# Altium PCB classyTKL_SMK.PcbDoc (part 1 of 2)
Units mm, origin at the board's own origin, x right, y up, seen from the top; angles counter-clockwise.
Board outline 346.59 x 122.85 mm, 2 copper layers (Component Side, Bottom Layer), stack 1.571 mm thick; 201 components, 128 nets, 842 pads, 69 vias.
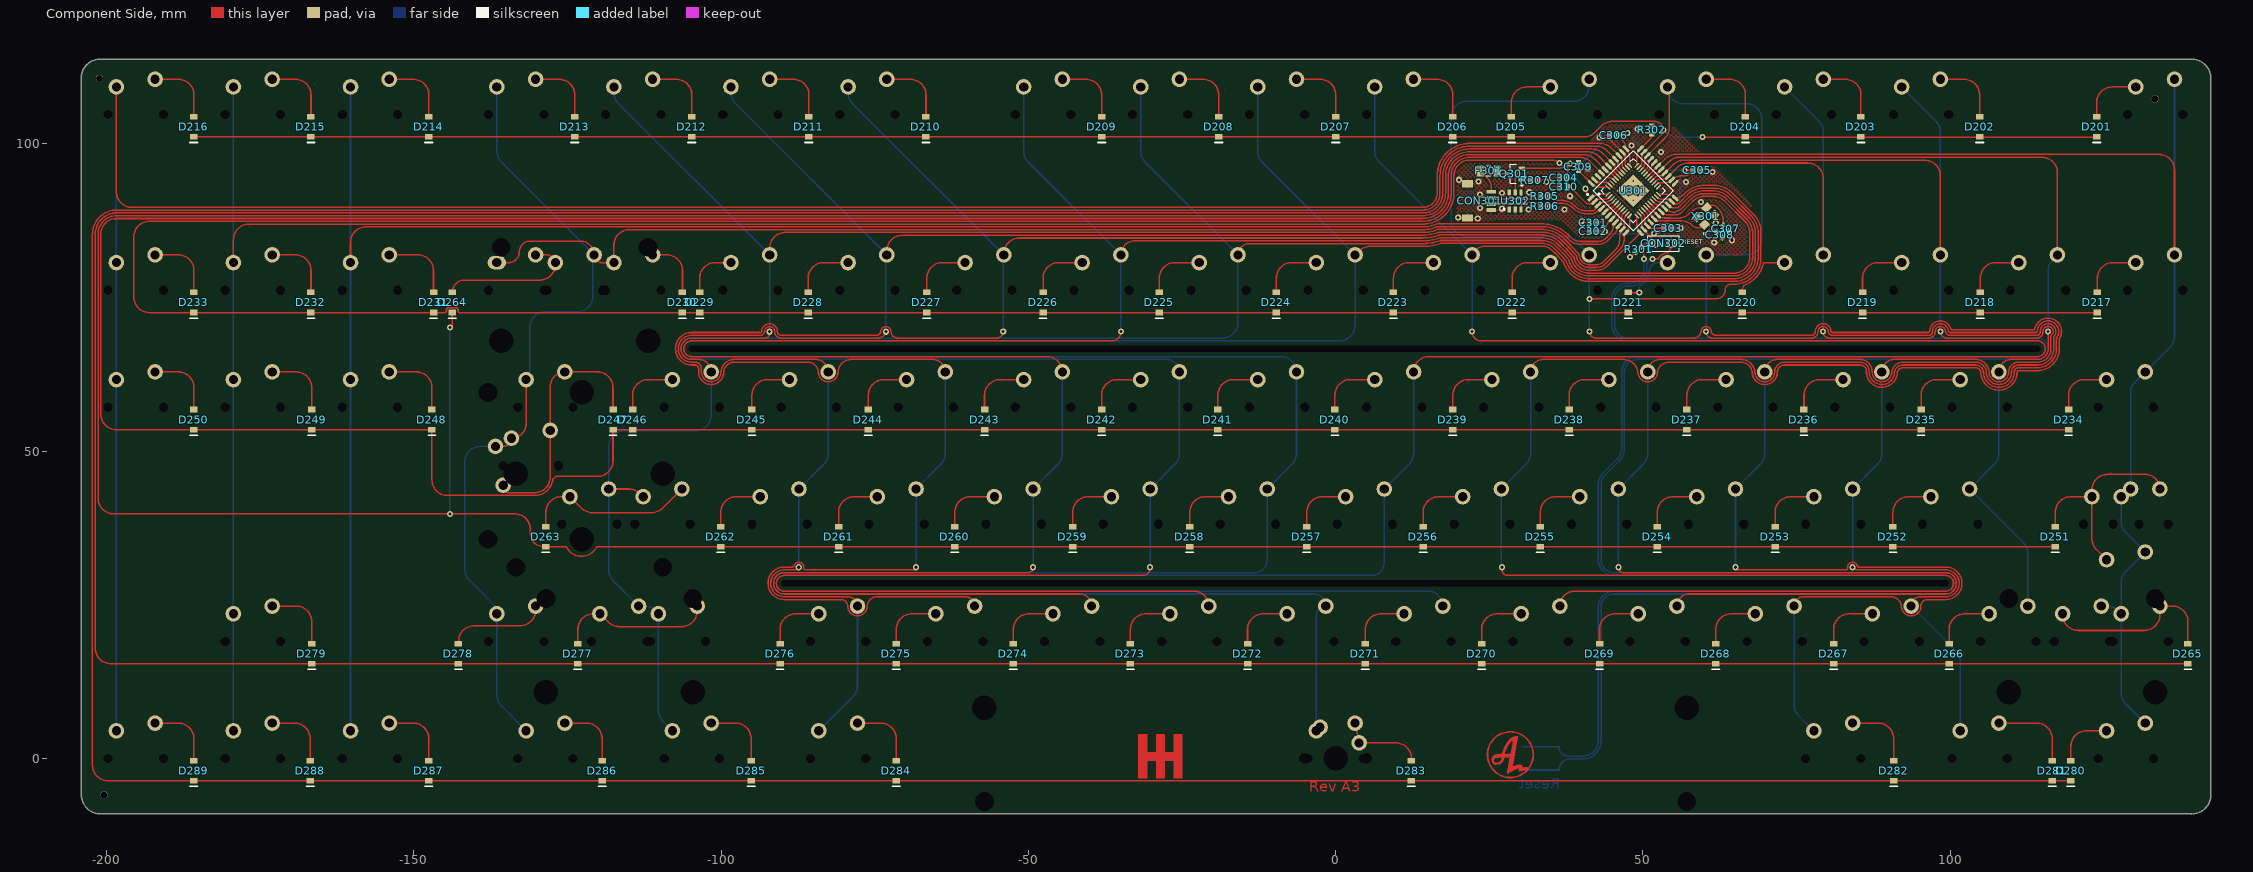
[diagram p0: Component Side view]
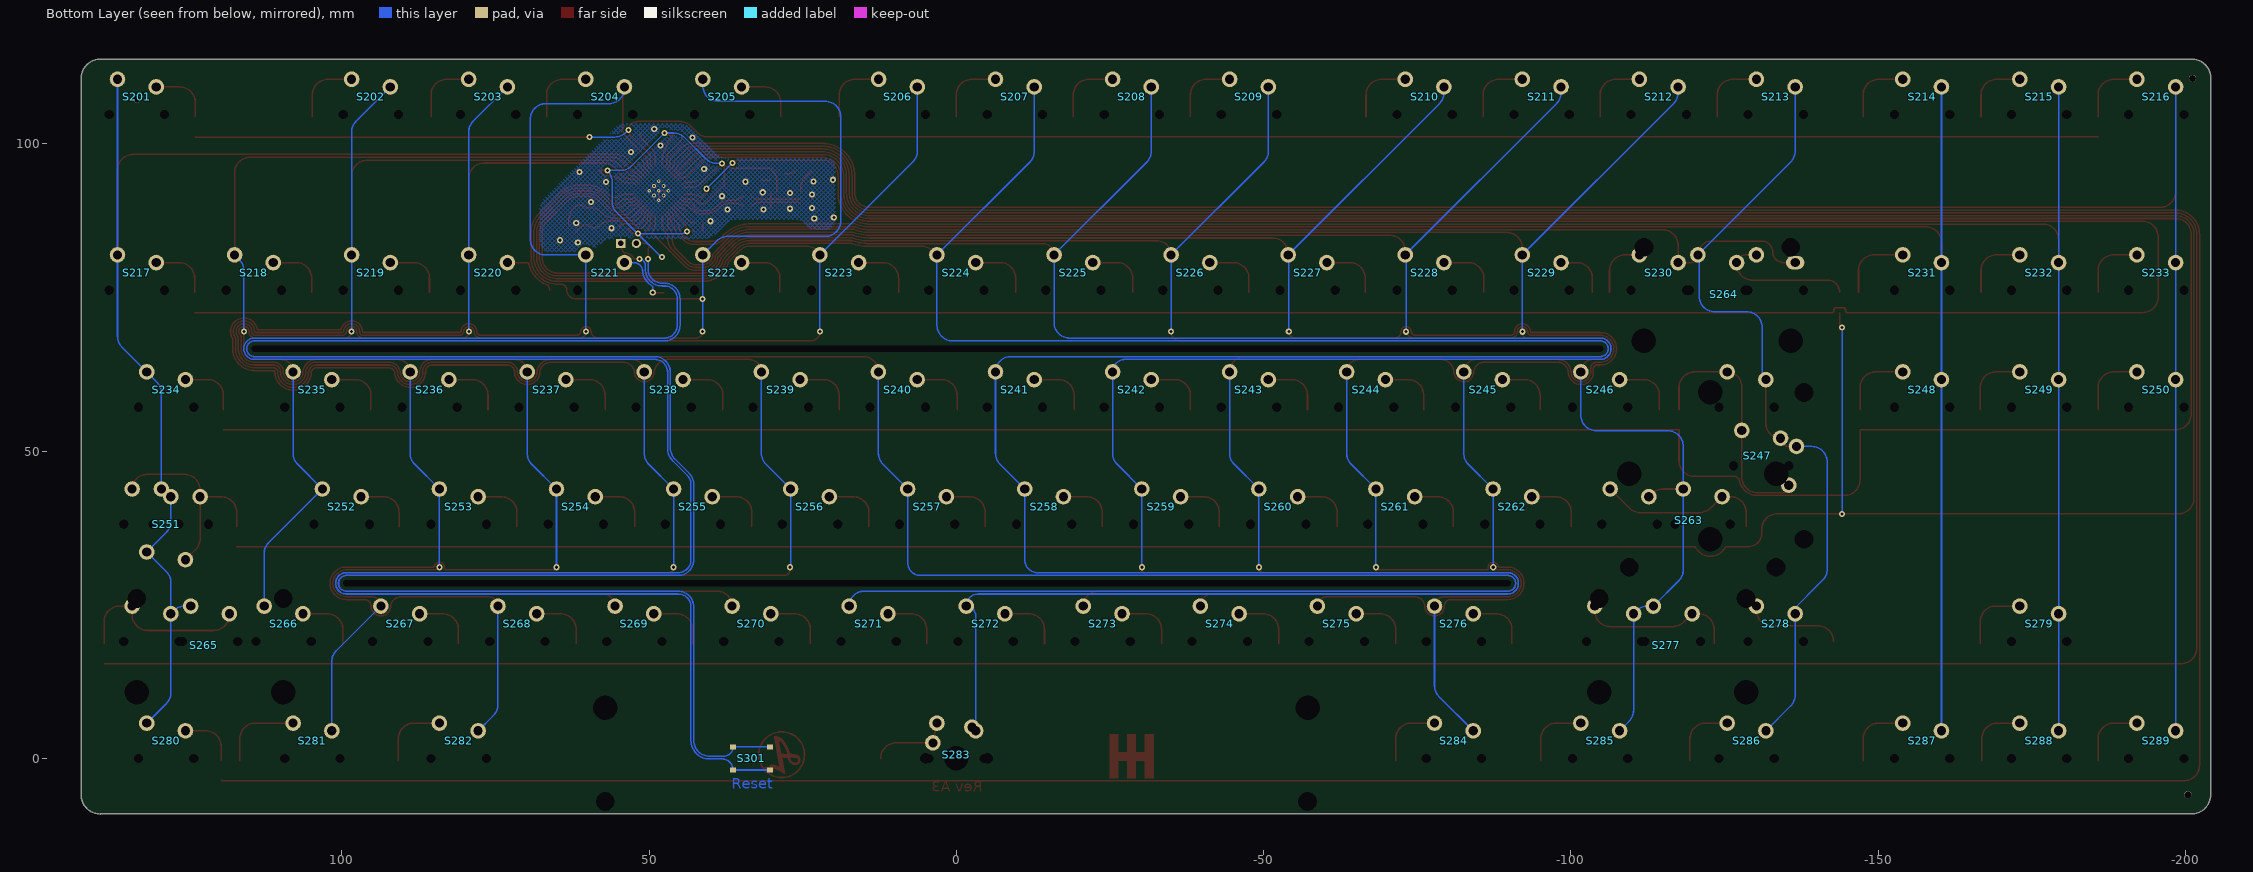
[diagram p1: Bottom Layer view, seen from below]
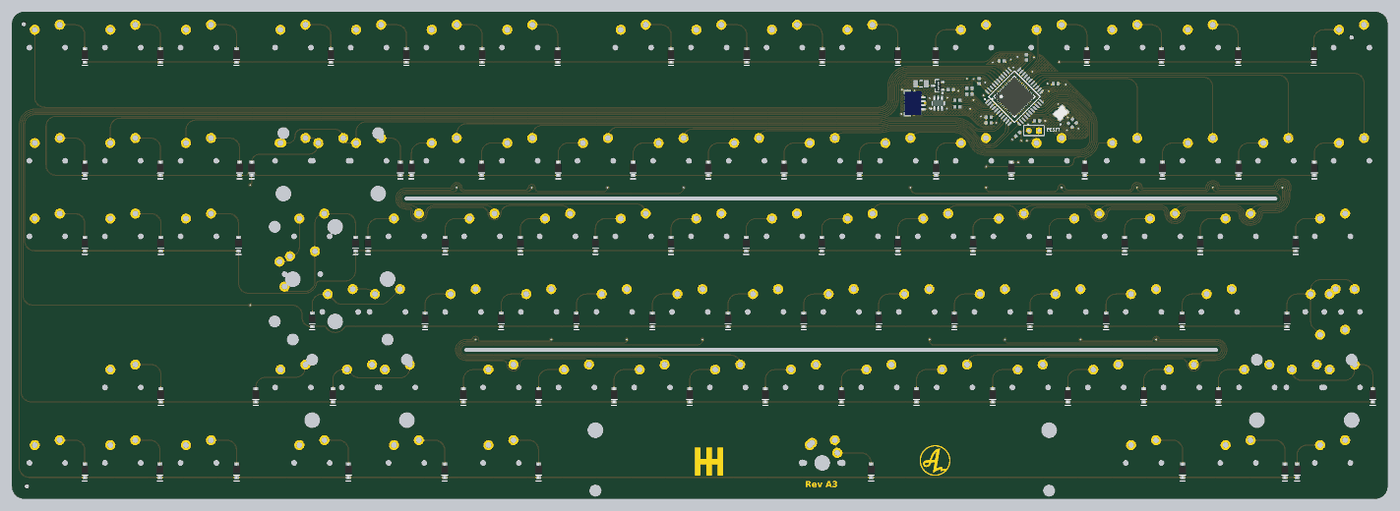
[diagram p3: 3D render of the assembled board from above, using the file's embedded part models]

## Layer stack, top to bottom
Top Solder: solder mask 0.0102, Solder Resist, Dk 3.5
Component Side: signal copper 0.0356
Dielectric 1: core 1.5, FR-4, Dk 4.2
Bottom Layer: signal copper 0.0356
Solder Side: solder mask 0.0102, Solder Resist, Dk 3.5

## Board outline
-204.127,-5.981 cw(c-204.032,-5.896) -204.159,-5.896 -204.159,110.685 cw(c-201.032,110.685) -201.032,113.812 cw(c-201.032,113.685) -200.974,113.798 139.295,113.798 cw(c139.295,110.671) 142.423,110.671 142.423,-5.883 cw(c142.299,-5.915) 142.427,-5.915 cw(c139.299,-5.915) 139.299,-9.042 cw(c139.299,-8.915) 139.233,-9.023 -201,-9.023 cw(c-201,-5.896)

## Design rules (kind name [scope] priority, off if disabled: settings)
Clearance [All] p1: gap=0.2 ignorepadtopadclearanceinfootprint=FALSE except(0: Arc-Hole Track-Hole SMDPad-Hole THPad-Hole Via-Hole Fill-Hole Poly-Hole Region-Hole Text-Hole; 0.254: THPad-THPad THPad-Via THPad-Fill THPad-Poly THPad-Region THPad-Text Via-Via Via-Fill Via-Poly Via-Region Via-Text Fill-Fill Fill-Poly Fill-Region Fill-Text Poly-Poly Poly-Region Poly-Text Region-Region Region-Text Text-Text)
ComponentClearance [InComponent('No Component') And OnLayer('Component Side')] p1: gap=0.254 collisioncheckmode=3 verticalgap=0.254 showdistances=FALSE
DiffPairsRouting DiffPairsRouting_USB [InDifferentialPairClass('All Differential Pairs')] p1: maxlimit=0.254 minlimit=0.203 mostfreqgap=0.203 toplayer_minwidth=0.152 toplayer_maxwidth=0.381 toplayer_prefwidth=0.152 bottomlayer_minwidth=0.152 bottomlayer_maxwidth=0.381 bottomlayer_prefwidth=0.152 maxuncoupledlength=12.7
DiffPairsRouting [All] p2: maxlimit=0.254 minlimit=0.254 mostfreqgap=0.254 toplayer_minwidth=0.381 toplayer_maxwidth=0.381 toplayer_prefwidth=0.381 bottomlayer_minwidth=0.381 bottomlayer_maxwidth=0.381 bottomlayer_prefwidth=0.381 maxuncoupledlength=12.7
HoleSize [All] p1: absolutevalues=TRUE maxlimit=20 minlimit=0.025 maxpercent=80.000 minpercent=20.000
MatchedLengths MatchedLengths_USB_DiffPairs_1 [All] p1: tolerance=0.127 checknetsindiffpair=TRUE checkdiffpairvsdiffpair=FALSE checkxsignals=FALSE checkothers=FALSE
MatchedLengths MatchedLengths_USB_DiffPairs [All] p2: tolerance=0.127 checknetsindiffpair=TRUE checkdiffpairvsdiffpair=FALSE checkxsignals=FALSE checkothers=FALSE
PolygonConnect PolygonConnect_1 [All vs IsVia] p1: connectstyle=Direct reliefconductorwidth=0.254 reliefentries=4 polygonreliefangle="90 Angle" airgapwidth=0.254
PolygonConnect [All] p2: connectstyle=Relief reliefconductorwidth=0.254 reliefentries=4 polygonreliefangle="90 Angle" airgapwidth=0.254
RoutingVias [All] p1: holewidth=0.711 width=1.27 viastyle="Through Hole" minholewidth=0.711 minwidth=1.27 maxholewidth=0.711 maxwidth=1.27
SolderMaskExpansion [All] p1: expansion=0.102 istentingtop=FALSE
Width [All] p1: maxlimit=0.254 minlimit=0.203 preferedwidth=0.254
27 further rules are at their usual default settings.

## Classes and differential pairs
component class Designator: C201 C202 C203 C204 C205 C206 D201 D202 D203 D204 D205 D206 D207 D208 D209 D210 D211 D212 D213 D214 D215 D216 D217 D218 D219 D220 D221 D222 D223 D224 D225 D226 D227 D228 D229 D230 D231 D232 D233 D234 D235 D236 D237 D238 D239 D240 D241 D242 D243 D244 D245 D246 D247 D248 D249 D250 D251 D252 D253 D254 D255 D256 D257 D258 D259 D260 D261 D262 D263 D264 D265 D266 D267 D268 D269 D270 D271 D272 D273 D274 D275 D276 D277 D278 D279 D280 D281 D282 D283 D284 D285 D286 D287 D288 D289 S201 S202 S203 S204 S205 S206 S207 S208 S209 S210 S211 S212 S213 S214 S215 S216 S217 S218 S219 S220 S221 S222 S223 S224 S225 S226 S227 S228 S229 S230 S231 S232 S233 S234 S235 S236 S237 S238 S239 S240 S241 S242 S243 S244 S245 S246 S247 S248 S249 S250 S251 S252 S253 S254 S255 S256 S257 S258 S259 S260 S261 S262 S263 S264 S265 S266 S267 S268 S269 S270 S271 S272 S273 S274 S275 S276 S277 S278 S279 S280 S281 S282 S283 S284 S285 S286 S287 S288 S289
differential pair D: +D_P -D_N
differential pair D_PRE: +D_PRE_P -D_PRE_N

## Components (designator, comment, footprint, x,y, rotation, side; value= is the part's Value field where it differs from the comment)
C301 "" C0603[1608] 41.915,87.178 r0 top value=1uF
C302 "" C0603[1608] 41.915,85.781 r0 top value=0.1uF
C303 "" C0603[1608] 54.107,86.289 r180 top value=0.1uF
C304 "" C0603[1608] 37.084,94.488 r0 top value=4,7uF
C305 "" C0603[1608] 58.806,95.687 r180 top value=0.1uF
C306 "" C0603[1608] 45.217,101.402 r0 top value=0.1uF
C307 "" C0603[1608] 63.5,86.233 r135 top value=15pF
C308 "" C0603[1608] 62.484,85.217 r135 top value=15pF
C309 "" C0603[1608] 39.502,96.322 r270 top value=0.1uF
C310 "" C0603[1608] 37.089,93.02 r0 top value=0.1uF
CON301 "Header 5" "JST SM04B-SRSS-TB" 21.468,93.54 r270 top
CON302 "Header 2" HDR1X2 54.61,83.82 r180 top
D201 "Diode" SOD-123 123.83,102.775 r90 top
D202 "Diode" SOD-123 104.78,102.775 r90 top
D203 "Diode" SOD-123 85.476,102.775 r90 top
D204 "Diode" SOD-123 66.68,102.775 r90 top
D205 "Diode" SOD-123 28.58,102.775 r90 top
D206 "Diode" SOD-123 19.055,102.775 r90 top
D207 "Diode" SOD-123 0.005,102.775 r90 top
D208 "Diode" SOD-123 -19.045,102.775 r90 top
D209 "Diode" SOD-123 -38.095,102.775 r90 top
D210 "Diode" SOD-123 -66.67,102.775 r90 top
D211 "Diode" SOD-123 -85.72,102.775 r90 top
D212 "Diode" SOD-123 -104.77,102.775 r90 top
D213 "Diode" SOD-123 -123.82,102.775 r90 top
D214 "Diode" SOD-123 -147.569,102.775 r90 top
D215 "Diode" SOD-123 -166.746,102.775 r90 top
D216 "Diode" SOD-123 -185.796,102.775 r90 top
D217 "Diode" SOD-123 123.957,74.2 r90 top
D218 "Diode" SOD-123 104.907,74.2 r90 top
D219 "Diode" SOD-123 85.73,74.2 r90 top
D220 "Diode" SOD-123 66.172,74.2 r90 top
D221 "Diode" SOD-123 47.63,74.2 r90 top
D222 "Diode" SOD-123 28.707,74.2 r90 top
D223 "Diode" SOD-123 9.403,74.2 r90 top
D224 "Diode" SOD-123 -9.647,74.2 r90 top
D225 "Diode" SOD-123 -28.697,74.2 r90 top
D226 "Diode" SOD-123 -47.62,74.2 r90 top
D227 "Diode" SOD-123 -66.543,74.2 r90 top
D228 "Diode" SOD-123 -85.847,74.2 r90 top
D229 "Diode" SOD-123 -103.5,74.2 r90 top
D230 "Diode" SOD-123 -106.294,74.2 r90 top
D231 "Diode" SOD-123 -146.807,74.2 r90 top
D232 "Diode" SOD-123 -166.746,74.2 r90 top
D233 "Diode" SOD-123 -185.796,74.2 r90 top
D234 "Diode" SOD-123 119.258,55.15 r90 top
D235 "Diode" SOD-123 95.255,55.15 r90 top
D236 "Diode" SOD-123 76.205,55.15 r90 top
D237 "Diode" SOD-123 57.155,55.15 r90 top
D238 "Diode" SOD-123 37.978,55.15 r90 top
D239 "Diode" SOD-123 19.055,55.15 r90 top
D240 "Diode" SOD-123 -0.122,55.15 r90 top
D241 "Diode" SOD-123 -19.172,55.15 r90 top
D242 "Diode" SOD-123 -38.095,55.15 r90 top
D243 "Diode" SOD-123 -57.145,55.15 r90 top
D244 "Diode" SOD-123 -76.068,55.15 r90 top
D245 "Diode" SOD-123 -94.991,55.15 r90 top
D246 "Diode" SOD-123 -114.422,55.15 r90 top
D247 "Diode" SOD-123 -117.597,55.15 r90 top
D248 "Diode" SOD-123 -147.061,55.15 r90 top
D249 "Diode" SOD-123 -166.619,55.15 r90 top
D250 "Diode" SOD-123 -185.796,55.15 r90 top
D251 "Diode" SOD-123 117.099,36.1 r90 top
D252 "Diode" SOD-123 90.683,36.1 r90 top
D253 "Diode" SOD-123 71.506,36.1 r90 top
D254 "Diode" SOD-123 52.329,36.1 r90 top
D255 "Diode" SOD-123 33.279,36.1 r90 top
D256 "Diode" SOD-123 14.229,36.1 r90 top
D257 "Diode" SOD-123 -4.694,36.1 r90 top
D258 "Diode" SOD-123 -23.744,36.1 r90 top
D259 "Diode" SOD-123 -42.794,36.1 r90 top
D260 "Diode" SOD-123 -61.971,36.1 r90 top
D261 "Diode" SOD-123 -80.894,36.1 r90 top
D262 "Diode" SOD-123 -100.071,36.1 r90 top
D263 "Diode" SOD-123 -128.519,36.1 r90 top
D264 "Diode" SOD-123 -143.759,74.2 r90 top
D265 "Diode" SOD-123 138.689,17.05 r90 top
D266 "Diode" SOD-123 99.827,17.05 r90 top
D267 "Diode" SOD-123 81.031,17.05 r90 top
D268 "Diode" SOD-123 61.854,17.05 r90 top
D269 "Diode" SOD-123 42.931,17.05 r90 top
D270 "Diode" SOD-123 23.754,17.05 r90 top
D271 "Diode" SOD-123 4.831,17.05 r90 top
D272 "Diode" SOD-123 -14.346,17.05 r90 top
D273 "Diode" SOD-123 -33.396,17.05 r90 top
D274 "Diode" SOD-123 -52.446,17.05 r90 top
D275 "Diode" SOD-123 -71.496,17.05 r90 top
D276 "Diode" SOD-123 -90.419,17.05 r90 top
D277 "Diode" SOD-123 -123.312,17.05 r90 top
D278 "Diode" SOD-123 -142.743,17.05 r90 top
D279 "Diode" SOD-123 -166.619,17.05 r90 top
D280 "Diode" SOD-123 119.639,-2 r90 top
D281 "Diode" SOD-123 116.591,-2 r90 top
D282 "Diode" SOD-123 90.81,-2 r90 top
D283 "Diode" SOD-123 12.324,-2 r90 top
D284 "Diode" SOD-123 -71.496,-2 r90 top
D285 "Diode" SOD-123 -95.118,-2 r90 top
D286 "Diode" SOD-123 -119.375,-2 r90 top
D287 "Diode" SOD-123 -147.569,-2 r90 top
D288 "Diode" SOD-123 -166.873,-2 r90 top
D289 "Diode" SOD-123 -185.796,-2 r90 top
F301 "Fuse" C1206[3216] 24.892,95.631 r0 top
Q301 "PMOS-2" SOT-23-3 29.083,95.123 r180 top
R301 "Res1" R0603[1608] 49.281,82.86 r45 top value=10K
R302 "Res1" R0603[1608] 51.44,102.291 r90 top value=10K
R305 "Res1" R0603[1608] 34.041,91.496 r180 top value=22
R306 "Res1" R0603[1608] 34.041,89.845 r180 top value=22
R307 "Res1" R0603[1608] 32.385,94.107 r0 top value=10K
S201 "MX" "SMK-switch - switched polarity" 133.349,104.775 r180 bottom locked
S202 "MX" SMK-switch 95.249,104.775 r180 bottom locked
S203 "MX" SMK-switch 76.199,104.775 r180 bottom locked
S204 "MX" SMK-switch 57.149,104.775 r180 bottom locked
S205 "MX" "SMK-switch - switched polarity" 38.099,104.775 r180 bottom locked
S206 "MX" SMK-switch 9.494,104.775 r180 bottom locked
S207 "MX" SMK-switch -9.526,104.775 r180 bottom locked
S208 "MX" SMK-switch -28.576,104.775 r180 bottom locked
S209 "MX" SMK-switch -47.626,104.775 r180 bottom locked
S210 "MX" SMK-switch -76.201,104.775 r180 bottom locked
S211 "MX" SMK-switch -95.251,104.775 r180 bottom locked
S212 "MX" SMK-switch -114.301,104.775 r180 bottom locked
S213 "MX" SMK-switch -133.351,104.775 r180 bottom locked
S214 "MX" SMK-switch -157.162,104.775 r180 bottom locked
S215 "MX" SMK-switch -176.213,104.775 r180 bottom locked
S216 "MX" SMK-switch -195.263,104.775 r180 bottom locked
S217 "MX" "SMK-switch - switched polarity" 133.349,76.2 r180 bottom locked
S218 "MX" "SMK-switch - switched polarity" 114.299,76.2 r180 bottom locked
S219 "MX" "SMK-switch - switched polarity" 95.249,76.2 r180 bottom locked
S220 "MX" "SMK-switch - switched polarity" 76.199,76.2 r180 bottom locked
S221 "MX" "SMK-switch - switched polarity" 57.149,76.2 r180 bottom locked
S222 "MX" "SMK-switch - switched polarity" 38.099,76.2 r180 bottom locked
S223 "MX" "SMK-switch - switched polarity" 19.049,76.2 r180 bottom locked
S224 "MX" "SMK-switch - switched polarity" -0.001,76.2 r180 bottom locked
S225 "MX" "SMK-switch - switched polarity" -19.051,76.2 r180 bottom locked
S226 "MX" "SMK-switch - switched polarity" -38.101,76.2 r180 bottom
S227 "MX" "SMK-switch - switched polarity" -57.151,76.2 r180 bottom locked
S228 "MX" "SMK-switch - switched polarity" -76.201,76.2 r180 bottom locked
S229 "MX" "SMK-switch - switched polarity" -95.251,76.2 r180 bottom locked
S230 "MX" SMK-switch -114.301,76.2 r180 bottom locked
S231 "MX" SMK-switch -157.162,76.2 r180 bottom locked
S232 "MX" SMK-switch -176.213,76.2 r180 bottom locked
S233 "MX" SMK-switch -195.263,76.2 r180 bottom locked
S234 "MX" "SMK-switch - 1.5U" 128.587,57.15 r180 bottom locked
S235 "MX" "SMK-switch - switched polarity" 104.774,57.15 r180 bottom locked
S236 "MX" "SMK-switch - switched polarity" 85.724,57.15 r180 bottom locked
S237 "MX" "SMK-switch - switched polarity" 66.674,57.15 r180 bottom locked
S238 "MX" "SMK-switch - switched polarity" 47.624,57.15 r180 bottom locked
S239 "MX" "SMK-switch - switched polarity" 28.574,57.15 r180 bottom locked
S240 "MX" "SMK-switch - switched polarity" 9.524,57.15 r180 bottom locked
S241 "MX" "SMK-switch - switched polarity" -9.526,57.15 r180 bottom locked
S242 "MX" "SMK-switch - switched polarity" -28.576,57.15 r180 bottom locked
S243 "MX" "SMK-switch - switched polarity" -47.626,57.15 r180 bottom locked
S244 "MX" "SMK-switch - switched polarity" -66.676,57.15 r180 bottom locked
S245 "MX" "SMK-switch - switched polarity" -85.726,57.15 r180 bottom locked
S246 "MX" "SMK-switch - switched polarity" -104.776,57.15 r180 bottom locked
S247 "MX" "SMK-SWITCH - PIPE_ISO_ENTER" -128.588,57.15 r0 bottom locked
S248 "MX" SMK-switch -157.162,57.15 r180 bottom locked
S249 "MX" SMK-switch -176.213,57.15 r180 bottom locked
S250 "MX" SMK-switch -195.263,57.15 r180 bottom locked
S251 "MX" "SMK-switch - CAPS" 126.206,38.1 r180 bottom locked
S252 "MX" "SMK-switch - switched polarity" 100.012,38.1 r180 bottom locked
S253 "MX" "SMK-switch - switched polarity" 80.962,38.1 r180 bottom locked
S254 "MX" "SMK-switch - switched polarity" 61.912,38.1 r180 bottom locked
S255 "MX" "SMK-switch - switched polarity" 42.862,38.1 r180 bottom locked
S256 "MX" "SMK-switch - switched polarity" 23.812,38.1 r180 bottom locked
S257 "MX" "SMK-switch - switched polarity" 4.762,38.1 r180 bottom locked
S258 "MX" "SMK-switch - switched polarity" -14.288,38.1 r180 bottom locked
S259 "MX" "SMK-switch - switched polarity" -33.338,38.1 r180 bottom locked
S260 "MX" "SMK-switch - switched polarity" -52.388,38.1 r180 bottom locked
S261 "MX" "SMK-switch - switched polarity" -71.438,38.1 r180 bottom locked
S262 "MX" "SMK-switch - switched polarity" -90.488,38.1 r180 bottom locked
S263 "MX" "SMK-switch - Enter_ANSI_ISO_KEY" -121.451,38.1 r180 bottom locked
S264 "MX" "SMK-switch - backspace" -123.826,76.2 r180 bottom locked
S265 "MX" "SMK-switch - Left shift v2" 121.443,19.05 r180 bottom locked
S266 "MX" "SMK-switch - switched polarity" 109.479,19.05 r180 bottom locked
S267 "MX" "SMK-switch - switched polarity" 90.487,19.05 r180 bottom locked
S268 "MX" "SMK-switch - switched polarity" 71.437,19.05 r180 bottom locked
S269 "MX" "SMK-switch - switched polarity" 52.387,19.05 r180 bottom locked
S270 "MX" "SMK-switch - switched polarity" 33.337,19.05 r180 bottom locked
S271 "MX" "SMK-switch - switched polarity" 14.287,19.05 r180 bottom locked
S272 "MX" "SMK-switch - switched polarity" -4.763,19.05 r180 bottom locked
S273 "MX" "SMK-switch - switched polarity" -23.813,19.05 r180 bottom locked
S274 "MX" "SMK-switch - switched polarity" -42.862,19.05 r180 bottom locked
S275 "MX" "SMK-switch - switched polarity" -61.913,19.05 r180 bottom locked
S276 "MX" "SMK-switch - switched polarity" -80.963,19.05 r180 bottom locked
S277 "MX" "SMK-switch - right shift v2" -116.581,19.05 r180 bottom locked
S278 "MX" SMK-switch -133.351,19.05 r180 bottom locked
S279 "MX" SMK-switch -176.213,19.05 r180 bottom locked
S280 "MX" "SMK-switch - 1.5U" 128.587,0 r180 bottom locked
S281 "MX" SMK-switch 104.775,0 r180 bottom locked
S282 "MX" "SMK-switch - 1.5U" 80.962,0 r180 bottom locked
S283 "MX" "SMK_MX-switch - 7u space" 0,0 r0 bottom locked
S284 "MX" "SMK-switch - 1.5U" -80.962,0 r180 bottom locked
S285 "MX" SMK-switch -104.775,0 r180 bottom
S286 "MX" "SMK-switch - 1.5U" -128.588,0 r180 bottom locked
S287 "MX" SMK-switch -157.163,0 r180 bottom locked
S288 "MX" SMK-switch -176.213,0 r180 bottom locked
S289 "MX" SMK-switch -195.263,0 r180 bottom locked
S301 "SW-PB" "XKB Switch" 33.337,0 r180 bottom
U301 "ATMEGA32U4" ATMEGA32U4-COMBO 48.411,92.392 r45 top
U302 "SRV05" SOT-23-6 29.215,90.734 r90 top
X301 "XTAL" XTAL-3225 60.198,88.265 r45 top

## Footprints (in the part's own frame and the unit in brackets; to place one, negate y for a bottom-side part, rotate by r counter-clockwise, add the part's x,y. Pads: shape width x height; smd on the part's side, far side on the other; paste and mask are expansions set on the pad)
ATMEGA32U4-COMBO [mm] "QFP, 44-Leads, Body 9,95x9,95mm, Pitch 0,80mm, IPC Medium Density"
  rect 1.35x0.5 smd: 1(-5.675,4)
  oval 1.05x0.25 smd: 1(-3.325,2.5) 2(-3.325,2) 3(-3.325,1.5) 4(-3.325,1) 5(-3.325,0.5) 6(-3.325,0) 7(-3.325,-0.5) 8(-3.325,-1) 9(-3.325,-1.5) 10(-3.325,-2) 11(-3.325,-2.5) 23(3.325,-2.5) 24(3.325,-2) 25(3.325,-1.5) 26(3.325,-1) 27(3.325,-0.5) 28(3.325,0) 29(3.325,0.5) 30(3.325,1) 31(3.325,1.5) 32(3.325,2) 33(3.325,2.5)
  oval 1.35x0.5 smd: 2(-5.675,3.2) 3(-5.675,2.4) 4(-5.675,1.6) 5(-5.675,0.8) 6(-5.675,0) 7(-5.675,-0.8) 8(-5.675,-1.6) 9(-5.675,-2.4) 10(-5.675,-3.2) 11(-5.675,-4) 23(5.675,-4) 24(5.675,-3.2) 25(5.675,-2.4) 26(5.675,-1.6) 27(5.675,-0.8) 28(5.675,0) 29(5.675,0.8) 30(5.675,1.6) 31(5.675,2.4) 32(5.675,3.2) 33(5.675,4)
  oval 0.5x1.35 smd: 12(-4,-5.675) 13(-3.2,-5.675) 14(-2.4,-5.675) 15(-1.6,-5.675) 16(-0.8,-5.675) 17(0,-5.675) 18(0.8,-5.675) 19(1.6,-5.675) 20(2.4,-5.675) 21(3.2,-5.675) 22(4,-5.675) 34(4,5.675) 35(3.2,5.675) 36(2.4,5.675) 37(1.6,5.675) 38(0.8,5.675) 39(0,5.675) 40(-0.8,5.675) 41(-1.6,5.675) 42(-2.4,5.675) 43(-3.2,5.675) 44(-4,5.675)
  oval 0.25x1.05 smd: 12(-2.5,-3.325) 13(-2,-3.325) 14(-1.5,-3.325) 15(-1,-3.325) 16(-0.5,-3.325) 17(0,-3.325) 18(0.5,-3.325) 19(1,-3.325) 20(1.5,-3.325) 21(2,-3.325) 22(2.5,-3.325) 34(2.5,3.325) 35(2,3.325) 36(1.5,3.325) 37(1,3.325) 38(0.5,3.325) 39(0,3.325) 40(-0.5,3.325) 41(-1,3.325) 42(-1.5,3.325) 43(-2,3.325) 44(-2.5,3.325)
  rect 3.81x3.81 smd paste-1000: 43(0,0)
  silkscreen extent -5.8,-4.6 4.6,4.92, body extent -3.6,-3.6 3.6,3.6, height 1
C0603[1608] [mm] "Chip Resistor, 2-Leads, Body 1,57x0,80mm, IPC Medium Density"
  rect 0.8x0.85 smd: 1(-0.65,0) 2(0.65,0)
  body extent -0.83,-0.43 0.82,0.43, height 0.5
C1206[3216] [mm]
  rect 1.2x1.8 smd: 1(-1.35,0) 2(1.35,0)
  silkscreen extent -0.35,-0.8 0.35,0.8, body extent -1.6,-0.9 1.6,0.9, height 1.2
HDR1X2 [mm] "Connector; Header; 2 Position"
  rect 1.5x1.5 hole 0.9 mask+0.102: 1(0,0)
  round 1.5 hole 0.9 mask+0.102: 2(2.54,0)
  silkscreen extent -1.27,-1.27 3.81,1.27
"JST SM04B-SRSS-TB" [mm]
  rect 0.6x1.55 smd: 1(1.3,3.875) 2(2.3,3.875) 3(3.3,3.875) 4(4.3,3.875)
  rect 1.2x1.8 smd: 5(0,0) 5(5.6,0)
  body extent -0.21,-0.76 5.79,4.19, height 3.25
R0603[1608] [mm] "Chip Resistor, 2-Leads, Body 1,57x0,80mm, IPC Medium Density"
  rect 0.8x0.85 smd: 1(-0.65,0) 2(0.65,0)
  body extent -0.83,-0.43 0.82,0.43, height 0.5
SMK-switch [mm]
  round 2.54 hole 1.499 mask+0.102: 1(-3.15,5.75) 2(3.15,4.5)
  round 1 hole 1.5 unplated: ""(-4.5,0) ""(4.5,0)
  round 1 on Mech14: ""(0,0)
"SMK-switch - 1.5U" [mm]
  round 2.54 hole 1.499 mask+0.102: 1(-3.15,5.75) 2(3.15,4.5)
  round 1 hole 1.5 unplated: ""(-4.5,0) ""(4.5,0)
  round 1 on Mech14: ""(0,0)
"SMK-switch - backspace" [mm]
  round 2.54 hole 1.499 mask+0.102: 1(3.15,4.5) 1(6.375,5.75) 2(-3.15,5.75)
  oval 3x2.2 hole 1.499 mask+0.102: 2(12.675,4.5)
  round 1.524 hole 3.988 unplated: ""(-11.938,-8.255) ""(11.938,-8.255)
  round 1.524 hole 3.048 unplated: ""(-11.938,6.985) ""(11.938,6.985)
  round 1 hole 1.5 unplated: ""(-4.5,0) ""(4.5,0) ""(5.025,0) ""(14.025,0)
  round 1 on Mech14: ""(0,0) ""(9.525,0)
"SMK-switch - CAPS" [mm]
  round 2.54 hole 1.499 mask+0.102: 1(-7.912,5.75) 1(0.769,-5.75) 1(3.15,4.5) 2(-5.531,-4.5) 2(-3.15,5.75) 2(-1.613,4.5)
  round 1 hole 1.5 unplated: ""(-9.263,0) ""(-4.5,0) ""(-0.262,0) ""(4.5,0)
  round 1 on Mech14: ""(-4.763,0) ""(-2.381,0) ""(0,0)
"SMK-switch - Enter_ANSI_ISO_KEY" [mm]
  round 2.54 hole 1.499 mask+0.102: 1(-15.056,5.75) 1(3.15,4.5) 2(-8.756,4.5) 2(-3.15,5.75)
  round 1 hole 1.5 unplated: ""(-16.406,0) ""(-7.406,0) ""(-4.5,0) ""(4.5,0)
  round 1.524 hole 3.048 unplated: ""(-11.938,-6.985) ""(11.938,-6.985)
  round 1.524 hole 3.988 unplated: ""(-11.938,8.255) ""(11.938,8.255)
  round 1 on Mech14: ""(-11.906,0) ""(-11.906,0) ""(0,0) ""(0,0)
"SMK-switch - Left shift v2" [mm]
  round 2.54 hole 1.499 mask+0.102: 1(-12.675,5.75) 1(3.15,4.5) 2(-6.375,4.5) 2(-3.15,5.75)
  round 1 hole 1.5 unplated: ""(-14.025,0) ""(-5.025,0) ""(-4.5,0) ""(4.5,0)
  round 1.524 hole 3.988 unplated: ""(-11.938,-8.255) ""(11.938,-8.255)
  round 1.524 hole 3.048 unplated: ""(-11.938,6.985) ""(11.938,6.985)
  round 1 on Mech14: ""(-9.525,0) ""(0,0)
"SMK-SWITCH - PIPE_ISO_ENTER" [mm]
  round 2.54 hole 1.499 mask+0.102: 1(-6.881,12.675) 1(0.769,3.775) 1(3.15,-5.75) 2(-8.131,6.375) 2(-5.531,5.025) 2(-3.15,-4.5)
  round 1.524 hole 3.048 unplated: ""(-9.366,-2.413) ""(-9.366,21.463)
  round 1 hole 1.5 unplated: ""(-6.881,9.525) ""(-4.5,0) ""(2.119,9.525) ""(4.5,0)
  round 1 on Mech14: ""(-2.381,9.525) ""(-2.381,9.525) ""(0,0) ""(0,0)
  round 1.524 hole 3.988 unplated: ""(5.874,-2.413) ""(5.874,21.463)
"SMK-switch - right shift v2" [mm]
  round 2.54 hole 1.499 mask+0.102: 1(-12.675,5.75) 1(3.15,4.5) 2(-6.375,4.5) 2(-3.15,5.75)
  round 1 hole 1.5 unplated: ""(-14.025,0) ""(-5.025,0) ""(-4.5,0) ""(4.5,0)
  round 1.524 hole 3.988 unplated: ""(-11.938,-8.255) ""(11.938,-8.255)
  round 1.524 hole 3.048 unplated: ""(-11.938,6.985) ""(11.938,6.985)
  round 1 on Mech14: ""(-9.525,0) ""(0,0)
"SMK-switch - switched polarity" [mm]
  round 2.54 hole 1.499 mask+0.102: 1(3.15,4.5) 2(-3.15,5.75)
  round 1 hole 1.5 unplated: ""(-4.5,0) ""(4.5,0)
  round 1 on Mech14: ""(0,0)
"SMK_MX-switch - 7u space" [mm]
  round 2.54 hole 1.499 mask+0.102: 1(3.15,-5.75) 1(3.81,-2.54) 2(-3.15,-4.5) 2(-2.54,-5.08)
  round 1.524 hole 3.988 unplated: ""(-57.15,-8.255) ""(57.15,-8.255)
  round 1.524 hole 3.048 unplated: ""(-57.15,6.985) ""(57.15,6.985)
  round 1 hole 1.702 unplated: ""(-5.08,0) ""(5.08,0)
  round 1 hole 1.5 unplated: ""(-4.5,0) ""(4.5,0)
  round 1 hole 3.988 unplated: ""(0,0)
  round 1 on Mech14: ""(0,0)
SOD-123 [mm]
  rect 0.91x1.22 smd: 1(1.635,0) 2(-1.635,0)
  silkscreen extent -2.54,-0.64 -2.54,0.63, body extent -1.87,-0.85 1.88,0.85, height 1.2
SOT-23-3 [mm] "3.3v regulator, used in Windsond S2 proto 1"
  rect 1x0.55 smd: 1(-1.2,0.95) 2(-1.2,-0.95) 3(1.2,0)
  silkscreen extent -1.33,-1.55 0.7,1.95, body extent -1.45,-1.5 1.1,1.5, height 1
SOT-23-6 [mm]
  rect 1x0.55 smd: 1(-1.375,0.95) 2(-1.375,0) 3(-1.375,-0.95) 4(1.375,-0.95) 5(1.375,0) 6(1.375,0.95)
  silkscreen extent -1.5,-1.55 0.46,1.92, body extent -1.37,-1.44 1.47,1.49, height 1.05
"XKB Switch" [mm] "XKB Enterprise TS-1187A-C-D-B"
  rect 1x0.75 smd: 1(-3,1.875) 1(3,1.875) 2(-3,-1.875) 2(3,-1.875)
  body extent -3.25,-2.55 3.25,2.55, height 2
XTAL-3225 [mm]
  rect 1.4x1.2 smd: 1(-1.1,-0.85) 2(1.1,-0.85) 3(1.1,0.85) 4(-1.1,0.85)
  silkscreen extent -2.28,-2.03 -2.03,-1.78, body extent -1.6,-1.25 1.6,1.25, height 0.65

## Part data
C301: library part Cap, "Capacitor", LCSC MFG="Samsung Electro-Mechanics", LCSC Part #=C15849, MFG=KEMET, MFGPN=C0603C104M5RACTU, MRF.Part=CL10A105KB8NNNC, Version="0603 imperial"
C302 C303 C305 C306 C309 C310: library part Cap, "Capacitor", LCSC MFG=YAGEO, LCSC Part #=C14663, MFG=KEMET, MFGPN=C0603C104M5RACTU, MRF.Part=CC0603KRX7R9BB104, Version="0603 imperial"
C304: library part Cap, "Capacitor", LCSC MFG="Samsung Electro-Mechanics", LCSC Part #=C19666, MRF.Part=CL10A475KO8NNNC
C307 C308: library part Cap, "Capacitor", LCSC MFG="Samsung Electro-Mechanics", LCSC Part #=C1644, MRF.Part=CL10C150JB8NNNC, Version="0603 imperial"
CON301: "JST for USB daughter board", LCSC MFG="JST Sales America", LCSC Part #=C160404, MFG="JST Sales America Inc.", MFGPN=SM04B-SRSS-TB(LF)(SN), MRF.Part=SM04B-SRSS-TB(LF)(SN)
CON302: "Header, 2-Pin"
D201 D202 D203 D204 D205 D206 D207 D208 D209 D210 D211 D212 D213 D214 D215 D216 D217 D218 D219 D220 D221 D222 D223 D224 D225 D226 D227 D228 D229 D230 D231 D232 D233 D234 D235 D236 D237 D238 D239 D240 D241 D242 D243 D244 D245 D246 D247 D248 D249 D250 D251 D252 D253 D254 D255 D256 D257 D258 D259 D260 D261 D262 D263 D264 D265 D266 D267 D268 D269 D270 D271 D272 D273 D274 D275 D276 D277 D278 D279 D280 D281 D282 D283 D284 D285 D286 D287 D288 D289: "Default Diode", LCSC MFG=ST(Semtech), LCSC Part #=C81598, MRF.Part=1N4148W, Version=SOD-123
F301: library part "Fuse Thermal", "Thermal Fuse", LCSC MFG="Shenzhen JDT Fuse", LCSC Part #=C135338, MFG="Bel Fuse Inc.", MFGPN=0ZCJ0050FF2G, MRF.Part=ASMD1206-050
Q301: "P-Channel Power MOSFET", LCSC MFG="Vishay Intertech", LCSC Part #=C10487, MRF.Part=SI2301CDS-T1-GE3, Version=SOT23-3
R301 R302 R307: "Resistor", LCSC MFG="Uniroyal Elec", LCSC Part #=C25804, MFG="Panasonic Electronic Components", MFGPN=ERJ-3EKF5101V, MRF.Part=0603WAF1002T5E, Version="0603 imperial"
R305 R306: "Resistor", LCSC MFG="Uniroyal Elec", LCSC Part #=C23345, MFG="Panasonic Electronic Components", MFGPN=ERJ-3EKF5101V, MRF.Part=0603WAF220JT5E, Version="0603 imperial"
S201 S202 S203 S204 S205 S206 S207 S208 S209 S210 S211 S212 S213 S214 S215 S216 S217 S218 S219 S220 S221 S222 S223 S224 S225 S226 S227 S228 S229 S230 S231 S232 S233 S235 S236 S237 S238 S239 S240 S241 S242 S243 S244 S245 S246 S247 S248 S249 S250 S251 S252 S253 S254 S255 S256 S257 S258 S259 S260 S261 S262 S263 S264 S265 S266 S267 S268 S269 S270 S271 S272 S273 S274 S275 S276 S277 S278 S279 S280 S281 S282 S283 S284 S285 S286 S287 S288 S289: library part SW-PB, "Switch"
S234: library part SW-PB, "TAB"
S301: "Switch", LCSC MFG="XKB Enterprise", LCSC Part #=C318888, MFG=C&K, MFGPN="PTS645SM43SMTR92 LFS", MRF.Part=TS-1187A-C-D-B
U301: "MCU", LCSC MFG="Microchip Tech", LCSC Part #=C45874, MFG="Microchip Technology", MFGPN=ATMEGA32U4-MUR, MRF.Part=ATMEGA32U4-MUR
U302: LCSC MFG="ProTek Devices", LCSC Part #=C85364, MRF.Part=SRV05-4-P-T7
X301: "Crystal Oscillator", LCSC MFG="Yangxing Tech", LCSC Part #=C13738, MRF.Part=X322516MLB4SI

## Free pads (board coordinates)
  round 1.152 hole 1.152 unplated paste+0.148 mask+0.148: ""(-201.163,110.673) ""(-200.401,-5.913) ""(133.35,107.315)
  round 0 hole 1 slot 220 at 0 deg unplated mask+0.15: ""(4.704,66.675)
  round 0 hole 1 slot 190 at 0 deg unplated mask+0.15: ""(4.763,28.504)

## Via types
v1: diameter 1, hole 0.5, Component Side to Bottom Layer, tented both sides, 60 vias
v2: diameter 0.6, hole 0.3, Component Side to Bottom Layer, tented bottom, 9 vias

## Nets (pads, with @x,y where several pads share a name; then routed paths per layer and width w, separated by ;. In a path a pad name is that pad's centre, name@x,y a point inside that pad or via, vN(x,y) a via of type N, cw(c..) or ccw(c..) an arc to the next point about the centre after c; other vN are vias at no path point)
caps_led: U301.29 | length 2.4
  Component Side w0.254: U301.29@50.408,95.096 50.989,95.745 ccw(c50.206,96.449) 51.07,95.845 U301.29@51.858,96.97
col1: S201.2 S217.2 S234.1 S251.2 S265.2 S280.1 U301.28 | length 216.8
  Component Side w0.254: U301.28@50.762,94.743 U301.28@52.423,96.404 53.575,97.556 cw(c55.371,95.76) 55.371,98.3 133.959,98.3 cw(c133.959,95.76) 136.499,95.76 S217.2@136.499,81.95
  Bottom Layer w0.254: S265.2@124.593,24.8 125.516,24.8 cw(c125.516,22.26) 127.312,24.056 S265.2@127.818,23.55 ; S251.2@127.818,42.6 127.818,38.571 ccw(c130.358,38.571) 128.562,36.775 S251.2@131.737,33.6 128.562,30.425 ccw(c130.358,28.629) 127.818,28.629 S265.2@127.818,23.55 ; S251.2@129.356,43.85 129.356,59.467 cw(c131.896,59.467) 130.1,61.263 S234.1@131.737,62.9 135.756,66.919 ccw(c133.959,68.715) 136.499,68.715 S217.2@136.499,81.95 S201.2@136.499,110.525 ; S280.1@131.737,5.75 128.562,8.925 cw(c130.358,10.721) 127.818,10.721 S265.2@127.818,23.55
col2: S218.2 S235.2 S252.2 S266.2 U301.27 | length 151.8
  Component Side w0.254: U301.27@51.115,94.389 51.82,95.093 cw(c52.202,94.711) 52.202,95.252 ccw(c52.202,95.735) 52.544,95.393 U301.27@52.989,95.839 54.253,97.102 cw(c56.049,95.306) 56.049,97.846 114.909,97.846 cw(c114.909,95.306) 117.449,95.306 S218.2@117.449,81.95 ; S235.2@107.924,62.9 cw(c109.964,62.9) 109.964,64.94 114.204,64.94 ccw(c114.204,66.675) 115.921,66.929 115.921,69.312 cw(c116.078,69.312) v1@116.078,69.469
  Bottom Layer w0.254: S235.2@107.924,62.484 107.924,49.665 cw(c105.384,49.665) 107.181,47.869 S252.2@103.162,43.85 111.886,35.126 cw(c110.089,33.33) 112.629,33.33 S266.2@112.629,24.8 ; v1(115.921,69.469) 115.921,79.369 cw(c118.461,79.369) 116.665,81.165 S218.2@117.449,81.95
col3: S202.2 S219.2 S236.2 S253.2 S267.2 S281.2 U301.26 | length 247.9
  Component Side w0.254: U301.26@51.469,94.036 51.982,94.549 ; 51.983,94.549 cw(c52.583,93.948) 52.583,94.798 ccw(c52.583,95.996) 53.431,95.149 U301.26@53.555,95.273 54.895,96.613 cw(c56.691,94.817) 56.691,97.357 95.859,97.357 cw(c95.859,94.817) 98.399,94.817 S219.2@98.399,81.95 ; v1@84.328,31.242 ccw(c84.877,31.242) 84.877,30.693 99.262,30.693 cw(c99.262,28.504) 99.262,26.315 95.152,26.315 ccw(c95.152,24.8) S267.2@93.637,24.8 ; S236.2@88.874,62.9 cw(c90.914,62.9) 90.914,64.94 104.137,64.94 cw(c104.137,62.742) 106.328,62.925 ; v1(98.399,69.469) ccw(c99.458,69.469) 99.458,68.41 114.135,68.41 ccw(c114.135,69.36) 115.084,69.36 ccw(c114.841,69.432) 115.095,69.44 cw(c115.921,69.469) 116.462,68.844 ccw(c116.629,68.652) 116.375,68.652 116.375,66.977 ccw(c116.629,66.977) 116.377,66.945 cw(c114.204,66.675) 114.204,64.486 111.091,64.486 ccw(c111.091,62.916) 109.521,62.923 ccw(c111.091,62.916) 109.521,62.916 cw(c107.924,62.9) 106.328,62.925 ; 106.335,62.742 cw(c107.924,62.9) 106.328,62.925
  Bottom Layer w0.254: v1(84.112,31.115) S253.2@84.112,43.85 88.131,47.869 ccw(c86.334,49.665) 88.874,49.665 S236.2@88.874,62.9 ; S202.2@92.1,109.275 97.656,103.719 cw(c95.859,101.923) 98.399,101.923 S219.2@98.399,81.95 v1@98.399,69.469 ; S267.2@93.637,24.8 100.881,17.556 cw(c99.085,15.76) 101.625,15.76 S281.2@101.625,4.5
col4: S203.2 S220.2 S237.2 S254.2 S268.2 S282.2 U301.25 | length 315.3
  Component Side w0.254: U301.25@51.822,93.682 52.143,94.002 cw(c52.837,93.307) 52.837,94.29 53.113,94.29 ccw(c53.113,95.715) U301.25@54.121,94.707 ; U301.25@54.121,94.707 55.572,96.159 cw(c57.368,94.363) 57.368,96.903 76.809,96.903 cw(c76.809,94.363) 79.349,94.363 S220.2@79.349,81.95 ; v1(65.062,31.115) ccw(c65.484,31.115) 65.484,30.693 81.153,30.693 83.044,30.693 ccw(c83.044,30.947) 83.295,30.986 cw(c84.112,31.115) 84.91,31.334 ccw(c85.154,31.401) 85.154,31.147 99.262,31.147 cw(c99.262,28.504) 99.262,25.861 96.295,25.861 ccw(c96.295,24.8) 95.234,24.8 cw(c93.637,24.8) 92.04,24.804 ; S237.2@69.824,62.9 cw(c71.864,62.9) 71.864,64.94 85.33,64.94 cw(c85.33,62.99) 87.28,62.99 ccw(c88.874,62.9) 90.471,62.902 cw(c90.725,62.903) 90.471,62.904 cw(c90.725,62.903) 90.476,62.949 cw(c92.323,62.607) 92.323,64.486 104.137,64.486 cw(c104.137,62.742) 105.874,62.907 ccw(c107.924,62.9) 109.975,62.918 cw(c111.091,62.916) 111.091,64.032 114.204,64.032 ccw(c114.204,66.675) 116.83,66.975 cw(c117.083,67.004) 116.829,67.004 116.829,68.466 cw(c117.083,68.466) 116.891,68.632 ccw(c115.921,69.469) 114.64,69.476 cw(c114.386,69.478) 114.636,69.435 ccw(c115.084,69.36) 114.63,69.36 cw(c114.135,69.36) 114.135,68.864 99.952,68.864 cw(c99.952,69.601) 99.23,69.453 cw(c99.479,69.503) 99.226,69.493 cw(c99.479,69.503) 99.226,69.495 ccw(c98.399,69.469) 97.572,69.469 cw(c96.513,69.469) 96.514,68.41 95.631,68.41 83.058,68.41 80.37,68.41 cw(c80.37,69.469) v1(79.311,69.469) ; S268.2@74.587,24.8 cw(c76.102,24.8) 76.102,26.315 90.369,26.315 cw(c90.369,24.635) 92.04,24.804 ; 92.049,24.635 cw(c93.637,24.8) 92.04,24.804
  Bottom Layer w0.254: v1(65.062,31.115) S254.2@65.062,43.85 69.081,47.869 ccw(c67.284,49.665) 69.824,49.665 S237.2@69.824,62.9 ; S203.2@73.05,109.275 78.606,103.719 cw(c76.809,101.923) 79.349,101.923 S220.2@79.349,81.95 79.349,69.507 cw(c79.311,69.507) v1(79.311,69.469) ; S268.2@74.587,24.8 74.587,8.777 ccw(c77.127,8.777) 75.331,6.981 S282.2@77.813,4.5
col5: S204.2 S221.2 S238.2 S255.2 S269.2 U301.31 | length 362
  Component Side w0.254: v1(46.012,31.115) ccw(c46.888,31.115) 46.888,30.239 99.262,30.239 cw(c99.262,28.504) 99.262,26.769 57.506,26.769 ccw(c57.506,24.8) S269.2@55.537,24.8 ; U301.31@49.701,95.803 U301.31@49.903,96.006 ; U301.31@49.904,96.006 ccw(c48.952,96.957) 50.297,96.957 50.297,97.313 cw(c51.165,97.313) U301.31@50.551,97.926 ; U301.31@50.551,97.926 U301.31@50.726,98.101 53.564,100.939 ccw(c51.767,102.735) 54.307,102.735 54.307,109.553 S204.2@54.609,109.855 ; S238.2@50.774,62.9 cw(c52.814,62.9) 52.814,64.94 65.933,64.94 cw(c65.933,62.62) 68.225,62.975 cw(c67.974,62.936) 68.228,62.932 ccw(c69.824,62.9) 71.421,62.864 ; v1(60.279,69.469) ccw(c61.338,69.469) 61.338,68.41 64.516,68.41 75.819,68.41 77.425,68.41 ; 71.421,62.865 ccw(c69.824,62.9) 71.421,62.898 cw(c71.675,62.897) 71.421,62.899 cw(c71.675,62.897) 71.422,62.904 cw(c73.043,62.864) 73.043,64.486 85.33,64.486 cw(c85.33,62.99) 86.826,63.001 ccw(c88.874,62.9) 90.925,62.86 cw(c91.179,62.856) 90.932,62.912 cw(c92.323,62.607) 92.323,64.032 104.137,64.032 cw(c104.137,62.742) 105.418,62.897 cw(c105.166,62.868) 105.42,62.871 ccw(c107.924,62.9) 110.429,62.918 cw(c111.091,62.916) 111.091,63.578 114.204,63.578 ccw(c114.204,66.675) 117.284,67.002 cw(c117.537,67.029) 117.283,67.029 117.283,68.309 cw(c117.537,68.309) 117.33,68.457 ccw(c115.921,69.469) 114.188,69.559 cw(c113.935,69.572) 113.935,69.318 99.952,69.318 cw(c99.952,69.601) 99.729,69.427 cw(c99.93,69.583) 99.677,69.563 ccw(c98.399,69.469) 97.118,69.469 cw(c96.513,69.469) 96.513,68.864 82.169,68.864 80.859,68.864 cw(c80.859,69.595) 80.142,69.454 cw(c80.392,69.502) 80.138,69.493 cw(c80.392,69.502) 80.138,69.494 ccw(c79.311,69.469) 78.484,69.469 cw(c77.425,69.469) 77.426,68.41
  Bottom Layer w0.254: v1(46.012,31.115) S255.2@46.012,43.85 50.031,47.869 ccw(c48.234,49.665) 50.774,49.665 S238.2@50.774,62.9 ; S204.2@54,109.275 54,109.093 ccw(c56.54,109.093) 56.54,106.553 66.802,106.553 cw(c66.802,104.013) 69.342,104.013 69.342,84.49 cw(c66.802,84.49) 66.802,81.95 S221.2@60.299,81.95 60.299,69.49 cw(c60.279,69.49) v1(60.279,69.469)
col6: S205.2 S222.2 S239.2 S256.2 S270.2 U301.22 | length 504.7
  Component Side w0.254: v1@27.051,30.734 ccw(c28,30.734) 28,29.785 99.262,29.785 cw(c99.262,28.504) 99.262,27.223 38.91,27.223 ccw(c38.91,24.8) S270.2@36.487,24.8 ; S239.2@31.724,62.9 cw(c33.764,62.9) 33.764,64.94 46.791,64.94 cw(c46.791,62.504) 49.173,63.015 cw(c48.925,62.963) 49.178,62.956 cw(c48.925,62.963) 49.178,62.954 ccw(c50.774,62.9) 52.371,62.902 cw(c52.625,62.903) 52.371,62.904 cw(c52.625,62.903) 52.376,62.949 cw(c54.223,62.607) 54.223,64.486 65.933,64.486 cw(c65.933,62.62) 67.77,62.944 cw(c67.519,62.901) 67.774,62.901 ccw(c69.824,62.9) 71.875,62.892 cw(c72.129,62.891) 71.876,62.898 cw(c73.043,62.864) 73.043,64.032 85.33,64.032 cw(c85.33,62.99) 86.372,63.009 ccw(c88.874,62.9) 91.378,62.805 cw(c91.632,62.795) 91.387,62.862 cw(c92.323,62.607) 92.323,63.578 104.137,63.578 cw(c104.137,62.742) 104.963,62.871 cw(c104.712,62.833) 104.966,62.838 ccw(c107.924,62.9) 110.883,62.872 cw(c111.137,62.87) 111.138,63.124 114.204,63.124 ccw(c114.204,66.675) 117.738,67.027 cw(c117.991,67.052) 117.737,67.052 117.737,68.171 cw(c117.991,68.171) 117.776,68.306 ccw(c115.921,69.469) 113.79,69.968 cw(c113.542,70.026) 113.542,69.772 100.308,69.772 cw(c100.308,70.026) 100.065,69.955 ccw(c98.399,69.469) 96.666,69.559 cw(c96.413,69.572) 96.413,69.318 80.859,69.318 cw(c80.859,69.595) 80.648,69.417 cw(c80.842,69.58) 80.589,69.561 ccw(c79.311,69.469) 78.03,69.469 cw(c77.425,69.469) 77.425,68.864 63.373,68.864 61.829,68.864 cw(c61.829,69.597) 61.11,69.454 cw(c61.359,69.502) 61.106,69.493 cw(c61.359,69.502) 61.106,69.495 ccw(c60.279,69.469) 59.452,69.463 cw(c59.198,69.462) 59.449,69.425 cw(c58.279,69.592) 58.28,68.41 ; v1(41.275,69.469) ccw(c42.334,69.469) 42.334,68.41 43.688,68.41 56.388,68.41 58.279,68.41 ; v1@41.301,74.803 48.126,74.803 49.347,74.803 ccw(c49.347,75.057) 49.367,74.804 cw(c49.403,74.351) 49.439,74.804 ccw(c49.459,75.057) 49.459,74.803 51.589,74.803 61.976,74.803 ccw(c61.976,76.2) 63.373,76.2 cw(c64.348,76.2) 64.348,77.175 64.848,77.175 ccw(c64.848,81.531) 66.27,77.413 ccw(c64.848,81.531) 66.558,77.524 ccw(c64.848,81.531) 68.206,78.755 ccw(c64.848,81.531) 69.204,81.531 69.204,85.552 ccw(c64.848,85.552) 68.059,88.496 ccw(c64.848,85.552) 67.928,88.633 64.564,91.997 ccw(c61.482,88.918) 62.583,93.133 62.076,93.265 ccw(c62.011,93.02) 62.011,93.274 59.941,93.274 ccw(c59.941,88.918) 57.435,92.481 57.103,92.248 ccw(c57.248,92.039) 57.071,92.221 ; U301.22@52.53,91.808 53.801,91.808 cw(c53.801,89.756) U301.22@55.252,91.207 ccw(c55.252,93.15) 56.626,91.776 57.07,92.22 ; 59.452,69.463 cw(c60.279,69.469) 59.461,69.592
  Bottom Layer w0.254: v1(27.051,31.115) cw(c27.051,31.204) 26.962,31.204 S256.2@26.962,43.85 30.981,47.869 ccw(c29.184,49.665) 31.724,49.665 S239.2@31.724,62.9 ; v1@41.249,74.81 S222.2@41.249,81.95 38.98,84.219 ccw(c37.184,82.423) 37.184,84.963 21.336,84.963 cw(c21.336,87.503) 18.796,87.503 18.796,104.394 cw(c21.336,104.394) 21.336,106.934 38.709,106.934 ccw(c38.709,109.474) 41.249,109.474 S205.2@41.249,110.525 ; v1(41.275,69.469) v1@41.275,74.785
  other v1: 41.301,74.759
col7: S206.2 S223.2 S240.2 S257.2 S271.2 U301.21 | length 568.4
  Component Side w0.254: S240.2@12.674,62.9 cw(c15.168,62.9) 15.168,65.394 114.204,65.394 ccw(c114.204,66.675) 114.204,67.956 23.712,67.956 cw(c23.712,69.469) v1(22.199,69.469) ; S223.2@22.212,82.17 22.678,82.637 cw(c24.474,80.841) 24.474,83.381 33.475,83.381 cw(c33.475,80.841) 35.271,82.637 35.714,82.194 36.158,81.75 36.267,81.641 cw(c36.088,81.461) 36.275,81.632 36.827,81.033 37.064,80.775 cw(c36.877,80.602) 37.12,80.677 ccw(c41.249,81.95) 37.348,80.093 ccw(c41.249,81.95) 38.37,78.728 ccw(c41.249,81.95) 40.744,77.659 ; 39.839,77.866 ccw(c41.249,81.95) 41.249,77.629 ccw(c41.249,81.95) 41.269,77.629 ccw(c41.287,81.361) 41.287,77.629 64.848,77.629 ccw(c64.848,81.531) 68.75,81.531 68.75,85.552 ccw(c64.848,85.552) 67.609,88.31 ccw(c64.848,85.552) 67.608,88.311 64.242,91.677 ccw(c61.482,88.918) 64.241,91.678 ccw(c61.482,88.918) 61.482,92.82 59.941,92.82 ccw(c59.941,88.918) 57.182,91.678 ccw(c59.941,88.918) 57.181,91.677 55.98,90.475 ; U301.21@52.176,91.455 52.383,91.248 ccw(c52.964,91.83) 52.964,91.007 53.804,91.007 cw(c53.804,89.759) U301.21@54.686,90.641 ; U301.21@54.686,90.641 54.907,90.421 ccw(c55.377,90.892) 55.377,90.226 ccw(c55.377,91.078) 55.979,90.475
  Bottom Layer w0.254: S206.2@6.345,109.275 6.345,98.857 ccw(c8.885,98.857) 7.088,97.061 S223.2@22.199,81.95 v1@22.199,69.469 ; S240.2@12.674,62.9 12.674,49.665 cw(c10.134,49.665) 11.931,47.869 S257.2@7.912,43.85 7.912,31.855 cw(c5.842,31.855) 5.842,29.785 -89.737,29.785 ccw(c-89.737,28.504) -89.737,27.223 15.014,27.223 cw(c15.014,24.8) S271.2@17.437,24.8
col8: S207.2 S224.2 S241.2 S258.2 S272.2 S283.2 U301.20 | length 581.9
  Component Side w0.254: S224.2@3.149,81.95 3.787,82.587 cw(c5.583,80.791) 5.583,83.331 14.198,83.331 ccw(c14.198,92.004) 16.868,83.752 ccw(c14.198,92.004) 17.071,83.821 cw(c17.156,83.581) 17.157,83.835 33.475,83.835 cw(c33.475,80.841) 35.591,82.959 ; 35.592,82.958 36.035,82.515 36.481,82.069 36.594,81.956 cw(c36.415,81.775) 36.603,81.947 37.452,81.024 cw(c37.265,80.851) 37.453,81.022 37.469,81.005 cw(c37.283,80.832) 37.527,80.901 ccw(c41.249,81.95) 38.262,79.494 ccw(c41.249,81.95) 39.296,78.613 ccw(c41.249,81.95) 41.249,78.083 ccw(c41.249,81.95) 41.271,78.083 ccw(c41.287,81.361) 41.287,78.083 64.848,78.083 ccw(c64.848,81.531) 68.296,81.531 68.296,85.552 ccw(c64.848,85.552) 67.287,87.99 63.921,91.356 ccw(c61.482,88.918) 61.482,92.366 59.941,92.366 ccw(c59.941,88.918) 57.502,91.356 56.032,89.885 cw(c55.171,90.996) 55.171,89.591 cw(c55.171,90.958) 54.205,89.991 U301.20@54.121,90.076 ccw(c52.968,88.924) 52.968,90.553 52.677,90.553 cw(c52.837,91.64) 52.06,90.863 U301.20@51.822,91.101
  Bottom Layer w0.254: S207.2@-12.675,109.275 -12.675,98.827 ccw(c-10.135,98.827) -11.932,97.031 S224.2@3.149,81.95 3.149,70.496 cw(c0.609,70.496) 0.609,67.956 -104.796,67.956 ccw(c-104.796,66.675) -104.796,65.394 -8.869,65.394 cw(c-8.869,62.9) S241.2@-6.376,62.9 -6.376,49.665 cw(c-8.916,49.665) -7.119,47.869 S258.2@-11.138,43.85 -11.138,32.309 cw(c-13.208,32.309) -13.208,30.239 -89.737,30.239 ccw(c-89.737,28.504) -89.737,26.769 -3.582,26.769 cw(c-3.582,24.8) S272.2@-1.613,24.8 ccw(c-1.613,23.263) -3.15,23.263 S283.2@-3.15,4.5
col9: S208.2 S225.2 S242.2 S259.2 S273.2 U301.19 | length 503.8
  Component Side w0.254: v1@-30.099,31.115 cw(c-31.429,31.115) -31.429,29.785 -89.737,29.785 ccw(c-89.737,28.504) -89.737,27.223 -23.086,27.223 cw(c-23.086,24.8) S273.2@-20.663,24.8 ; S225.2@-15.901,81.95 cw(c-14.066,81.95) -14.066,83.785 14.198,83.785 ccw(c14.198,92.004) 16.336,84.068 ccw(c14.198,92.004) 16.991,84.274 cw(c17.077,84.035) 17.078,84.289 33.475,84.289 cw(c33.475,80.841) 35.913,83.279 36.42,82.772 36.922,82.27 cw(c36.743,82.09) 36.927,82.266 ; 36.927,82.265 cw(c36.743,82.09) 36.931,82.261 37.924,81.181 ccw(c41.249,81.95) 38.44,80.012 ccw(c41.249,81.95) 39.925,78.804 ccw(c41.249,81.95) 41.249,78.537 ccw(c41.249,81.95) 41.268,78.537 cw(c41.269,78.283) 41.271,78.537 ccw(c41.287,81.361) 41.287,78.537 64.848,78.537 ccw(c64.848,81.531) 67.842,81.531 67.842,85.552 ccw(c64.848,85.552) 66.966,87.668 ; U301.19@51.469,90.747 51.817,90.399 ccw(c52.542,91.123) 52.542,90.099 cw(c52.542,89.075) 53.266,89.799 U301.19@53.555,89.51 U301.19@53.573,89.491 ; U301.19@53.574,89.491 ccw(c54.996,90.914) 54.996,88.902 ccw(c54.996,90.577) 56.181,89.393 57.823,91.035 ; 57.824,91.036 cw(c59.941,88.918) 59.941,91.912 61.482,91.912 cw(c61.482,88.918) 63.599,91.036 ; 63.6,91.035 66.966,87.669
  Bottom Layer w0.254: S208.2@-31.725,109.275 -31.725,98.827 ccw(c-29.185,98.827) -31.116,97.176 ccw(c-29.185,98.827) -30.982,97.031 S225.2@-15.901,81.95 -15.901,70.95 cw(c-18.441,70.95) -18.441,68.41 -104.796,68.41 ccw(c-104.796,66.675) -104.796,64.94 -27.466,64.94 cw(c-27.466,62.9) S242.2@-25.426,62.9 -25.426,49.665 cw(c-27.966,49.665) -26.169,47.869 S259.2@-30.188,43.85 -30.188,31.204 ccw(c-30.099,31.204) v1@-30.099,31.115
  other v1: -30.188,31.115
col10: S209.2 S226.2 S243.2 S260.2 S274.2 U301.18 | length 447.3
  Component Side w0.254: v1@-49.022,31.369 cw(c-50.152,31.369) -50.152,30.239 -89.737,30.239 ccw(c-89.737,28.504) -89.737,26.769 -41.681,26.769 cw(c-41.681,24.8) S274.2@-39.713,24.8 ; S243.2@-44.476,62.9 ccw(c-46.969,62.9) -46.969,65.394 -104.796,65.394 cw(c-104.796,66.675) -104.796,67.956 -36.438,67.956 ccw(c-36.438,69.469) v1(-34.925,69.469) ; S226.2@-34.951,81.95 cw(c-32.662,81.95) -32.662,84.239 14.198,84.239 ccw(c14.198,92.004) 16.218,84.506 ccw(c14.198,92.004) 16.908,84.727 cw(c16.997,84.489) 16.998,84.743 33.475,84.743 cw(c33.475,80.841) 36.233,83.601 cw(c33.475,80.841) 36.234,83.6 37.071,82.763 37.247,82.587 cw(c36.927,82.266) 37.26,82.574 37.261,82.572 38.216,81.534 38.294,81.449 cw(c38.108,81.277) 38.356,81.33 ccw(c41.249,81.95) 38.725,80.406 ccw(c41.249,81.95) 39.488,79.572 ccw(c41.249,81.95) 41.249,78.991 ccw(c41.249,81.95) 41.27,78.991 ccw(c41.287,81.361) 41.287,78.991 64.848,78.991 ccw(c64.848,81.531) 67.388,81.531 67.388,85.552 ccw(c64.848,85.552) 66.645,87.348 63.278,90.714 ccw(c61.482,88.918) 61.482,91.458 59.941,91.458 ccw(c59.941,88.918) 58.145,90.714 56.266,88.836 cw(c55.33,89.773) 55.33,88.448 54.188,88.448 cw(c54.188,90.143) U301.18@52.99,88.943 ; U301.18@51.115,90.394 51.745,89.764 ccw(c52.47,90.488) 52.102,89.532 cw(c52.102,88.809) 52.404,89.466 cw(c52.102,88.809) 52.613,89.321 U301.18@52.989,88.944
  Bottom Layer w0.254: S209.2@-50.775,109.275 -50.775,98.827 ccw(c-48.235,98.827) -50.032,97.031 S226.2@-34.951,81.95 v1@-34.951,69.062 ; v1@-49.111,31.115 cw(c-49.111,31.242) -49.238,31.242 S260.2@-49.238,43.85 -45.219,47.869 ccw(c-47.016,49.665) -44.476,49.665 S243.2@-44.476,62.9
  other v1: -49.238,31.115
col11: S210.2 S227.2 S244.2 S261.2 S275.2 U301.12 | length 376.7
  Component Side w0.254: -84.165,62.742 cw(c-82.576,62.9) -84.172,62.907 ; -80.987,62.734 cw(c-82.576,62.9) -84.172,62.907 ; -80.987,62.735 ccw(c-82.576,62.9) -80.979,62.914 cw(c-80.725,62.917) -80.979,62.916 cw(c-80.725,62.917) -80.977,62.941 cw(c-78.781,62.734) -78.781,64.94 -65.566,64.94 cw(c-65.566,62.9) S244.2@-63.526,62.9 S244.2@-63.526,62.992 ; -74.025,69.479 cw(c-73.198,69.45) -74.013,69.591 ; -72.371,69.469 cw(c-73.198,69.45) -72.371,69.448 ; v1(-68.288,31.115) cw(c-68.71,31.115) -68.71,30.693 -84.201,30.693 -86.308,30.693 cw(c-86.308,30.947) -86.559,30.986 ccw(c-87.376,31.115) -88.174,31.334 cw(c-88.418,31.401) -88.418,31.147 -88.773,31.147 -89.737,31.147 ccw(c-89.737,28.504) -89.737,25.861 -80.471,25.861 cw(c-80.471,24.8) -79.41,24.8 ccw(c-77.813,24.8) -76.216,24.762 ccw(c-77.813,24.8) -76.216,24.797 cw(c-75.962,24.796) -76.216,24.798 cw(c-75.962,24.796) -76.216,24.803 cw(c-74.664,24.762) -74.664,26.315 -60.278,26.315 cw(c-60.278,24.8) S275.2@-58.763,24.8 ; v1(-54.102,69.469) cw(c-55.161,69.469) -55.161,68.41 -71.312,68.41 cw(c-71.312,69.469) -72.371,69.448 ; S227.2@-54.001,81.95 -54.001,82.153 cw(c-51.461,82.153) -51.461,84.693 14.198,84.693 ccw(c14.198,92.004) 16.755,85.155 ccw(c14.198,92.004) 16.822,85.18 cw(c16.914,84.943) 16.915,85.197 33.475,85.197 cw(c33.475,80.841) 36.555,83.921 37.567,82.909 cw(c36.927,82.266) 37.57,82.906 cw(c36.927,82.266) 37.58,82.896 ; U301.12@48.994,88.273 48.994,87.001 ccw(c51.046,87.001) U301.12@49.595,85.55 47.103,83.058 cw(c45.307,84.854) 46.98,82.943 44.226,80.189 cw(c42.43,81.985) 42.43,79.445 41.287,79.445 cw(c41.287,81.361) 41.27,79.445 cw(c41.249,81.95) 41.249,79.445 cw(c41.249,81.95) 40.435,79.581 cw(c41.249,81.95) 40.11,79.719 cw(c41.249,81.95) 38.838,81.273 cw(c41.249,81.95) 38.78,81.532 ccw(c38.529,81.489) 38.716,81.662 37.596,82.879 37.594,82.881 ccw(c36.927,82.266) 37.59,82.885 ; -84.172,62.907 ccw(c-85.909,62.742) -85.909,64.486 -97.831,64.486 ccw(c-97.831,62.734) -99.573,62.922 ccw(c-99.321,62.895) -99.575,62.895 cw(c-101.626,62.9) -103.676,62.937 ccw(c-103.93,62.941) -103.676,62.942 -103.676,63.478 ccw(c-104.231,63.478) -104.231,64.032 -104.796,64.032 cw(c-104.796,66.675) -104.796,69.318 -93.663,69.318 ccw(c-93.663,69.591) -93.486,69.383 ccw(c-93.651,69.576) -93.398,69.555 cw(c-92.121,69.45) -90.84,69.456 ccw(c-90.586,69.457) -90.84,69.45 ccw(c-90.235,69.469) -90.235,68.864 -74.74,68.864 ccw(c-74.74,69.591) -74.031,69.431 ccw(c-74.278,69.488) -74.025,69.478 cw(c-73.198,69.45) -72.371,69.448 ; 37.58,82.896 cw(c36.927,82.266) 37.59,82.885 ; 37.58,82.896 37.59,82.885
  Bottom Layer w0.254: S210.2@-79.35,109.275 -79.35,108.352 ccw(c-76.81,108.352) -78.607,106.556 S227.2@-54.001,81.95 ccw(c-54.001,81.849) -54.102,81.849 v1(-54.102,69.469) ; v1@-68.159,31.115 cw(c-68.159,31.244) -68.288,31.244 S261.2@-68.288,43.85 -64.269,47.869 ccw(c-66.066,49.665) -63.526,49.665 S244.2@-63.526,62.357